# EAGLE board Link232-wifi (EAGLE 9.6.2)
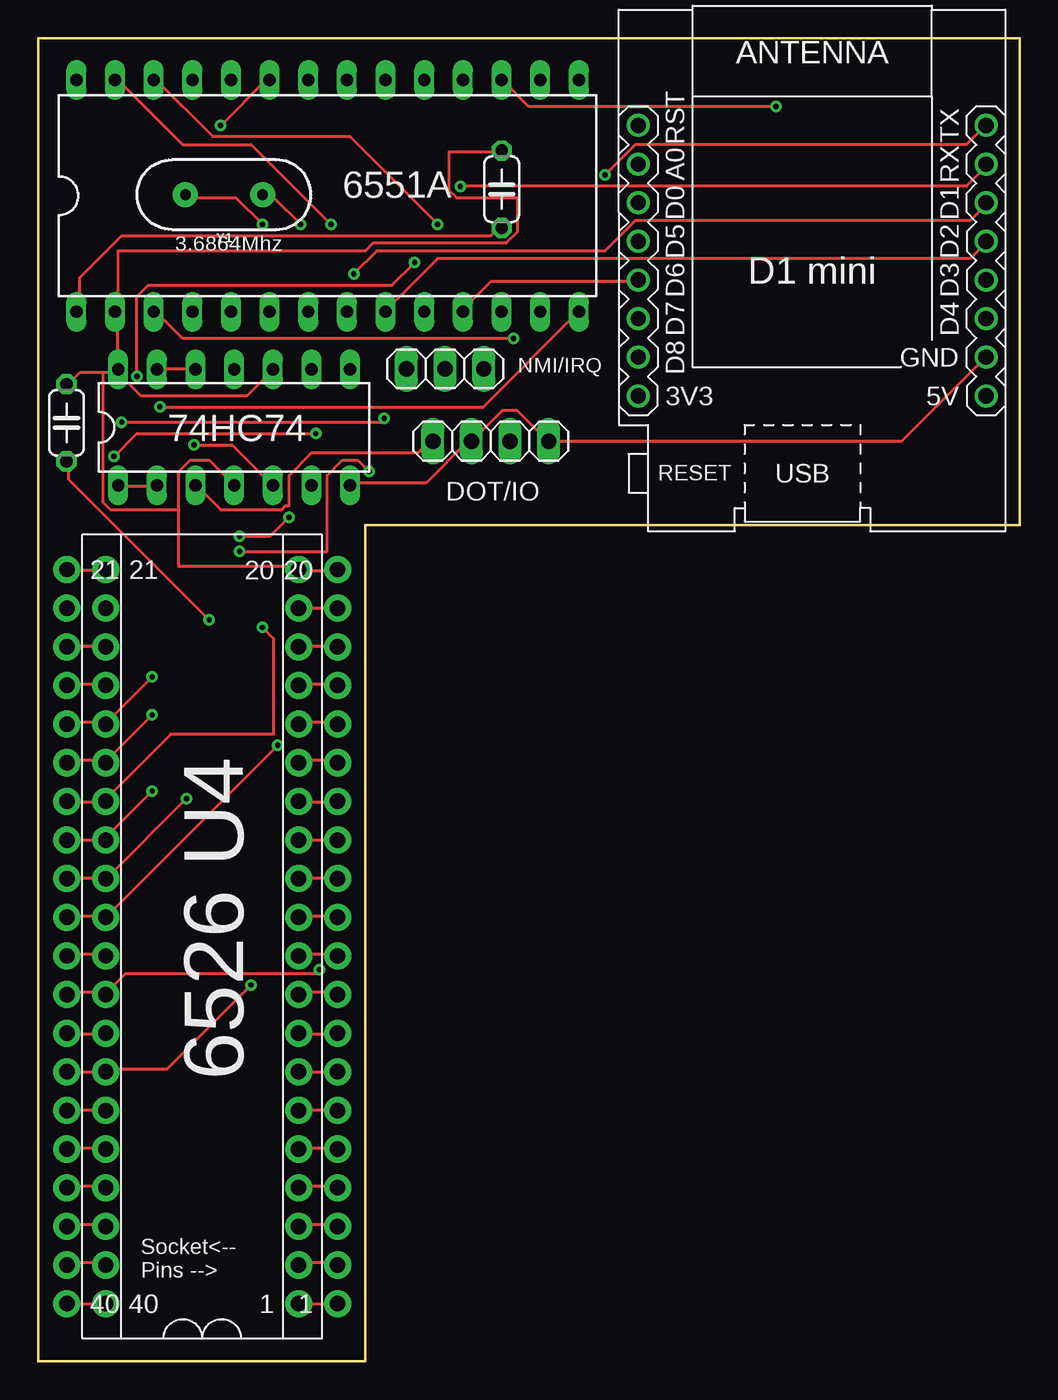
[diagram p0: board, top side]
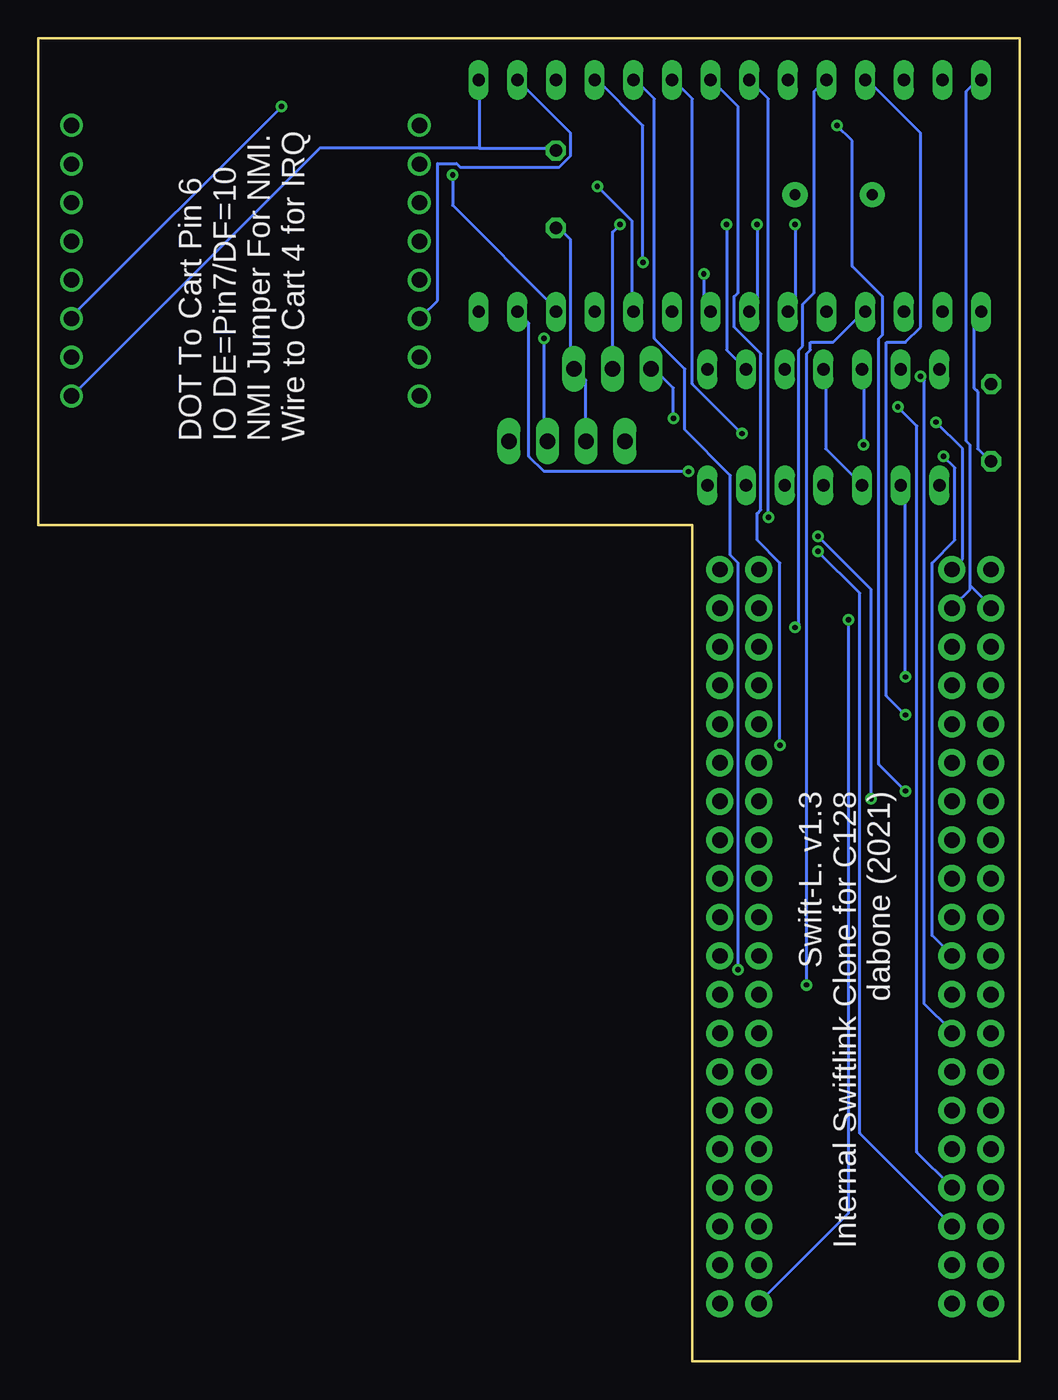
[diagram p1: board, bottom side, seen from below]

Size 64.5 x 87 mm. Coordinates in mm from the lower left corner, seen from the top.
Outline: 0,0 21.5,0 21.5,55 64.5,55 64.5,87 0,87 0,0
Copper layers (1*16): Top 0.035mm / dielectric 1.5mm / Bottom 0.035mm
Design rules "default *": minimum track width 8mil, minimum drill 0.35mm, track to track 6mil, track to pad 6mil, pad to pad 6mil, via to via 6mil, smd to smd 6mil, copper to edge 40mil, drill to drill 6mil, minimum pad ring 10mil, minimum via ring 8mil, stop-mask expansion 4mil, vias tented up to drill 0mil, thermal gap 10mil

## Footprints (pad centres in the part's own frame; a part is rotated, then mirrored left to right if it is on the bottom)
C050-024X044 = drill 0.813 octagon: 1 -2.54,0; 2 2.54,0
1X04 = drill 1.016 long: 1 -3.81,0; 2 -1.27,0; 3 1.27,0; 4 3.81,0
6551 = drill 0.813 long: 1 -16.51,-7.62; 2 -13.97,-7.62; 3 -11.43,-7.62; 4 -8.89,-7.62; 5 -6.35,-7.62; 6 -3.81,-7.62; 7 -1.27,-7.62; 8 1.27,-7.62; 9 3.81,-7.62; 10 6.35,-7.62; 11 8.89,-7.62; 12 11.43,-7.62; 13 13.97,-7.62; 14 16.51,-7.62; 15 16.51,7.62; 16 13.97,7.62; 17 11.43,7.62; 18 8.89,7.62; 19 6.35,7.62; 20 3.81,7.62; 21 1.27,7.62; 22 -1.27,7.62; 23 -3.81,7.62; 24 -6.35,7.62; 25 -8.89,7.62; 26 -11.43,7.62; 27 -13.97,7.62; 28 -16.51,7.62
DIL14 = drill 0.813 long: 1 -7.62,-3.81; 2 -5.08,-3.81; 3 -2.54,-3.81; 4 0,-3.81; 5 2.54,-3.81; 6 5.08,-3.81; 7 7.62,-3.81; 8 7.62,3.81; 9 5.08,3.81; 10 2.54,3.81; 11 0,3.81; 12 -2.54,3.81; 13 -5.08,3.81; 14 -7.62,3.81
DIP40 = drill 1.016 pad 1.778: 1 -24.13,-7.62; 2 -21.59,-7.62; 3 -19.05,-7.62; 4 -16.51,-7.62; 5 -13.97,-7.62; 6 -11.43,-7.62; 7 -8.89,-7.62; 8 -6.35,-7.62; 9 -3.81,-7.62; 10 -1.27,-7.62; 11 1.27,-7.62; 12 3.81,-7.62; 13 6.35,-7.62; 14 8.89,-7.62; 15 11.43,-7.62; 16 13.97,-7.62; 17 16.51,-7.62; 18 19.05,-7.62; 19 21.59,-7.62; 20 24.13,-7.62; 21 24.13,7.62; 22 21.59,7.62; 23 19.05,7.62; 24 16.51,7.62; 25 13.97,7.62; 26 11.43,7.62; 27 8.89,7.62; 28 6.35,7.62; 29 3.81,7.62; 30 1.27,7.62; 31 -1.27,7.62; 32 -3.81,7.62; 33 -6.35,7.62; 34 -8.89,7.62; 35 -11.43,7.62; 36 -13.97,7.62; 37 -16.51,7.62; 38 -19.05,7.62; 39 -21.59,7.62; 40 -24.13,7.62
1X03 = drill 1.016 long: 1 -2.54,0; 2 0,0; 3 2.54,0
WEMOS-D1-MINI = drill 1: JP1.1 -11.43,9.525; JP1.2 -11.43,6.985; JP1.3 -11.43,4.445; JP1.4 -11.43,1.905; JP1.5 -11.43,-0.635; JP1.6 -11.43,-3.175; JP1.7 -11.43,-5.715; JP1.8 -11.43,-8.255; JP2.1 11.43,9.525; JP2.2 11.43,6.985; JP2.3 11.43,4.445; JP2.4 11.43,1.905; JP2.5 11.43,-0.635; JP2.6 11.43,-3.175; JP2.7 11.43,-5.715; JP2.8 11.43,-8.255
HC49US = drill 0.7 pad 1.651: 1 -2.54,0; 2 2.54,0

## Placement (x,y rotation side)
C1  .1uf  [C050-024X044]  30.47,77.06 270 top
C2  .1uf  [C050-024X044]  1.87,61.71 270 top
DOT/IO  [1X04]  29.75,60.5 0 top
IC1  6551  [6551]  19.03,76.63 0 top
IC2  74LS74N  [DIL14]  12.89,61.41 0 top
IC3  6526  [DIP40]  9.51,27.93 90 top
IC4  6526  [DIP40]  12.07,27.93 90 top
JP1  NMI/IRQ  [1X03]  26.75,65.25 0 top
NODEMCUMINI  WEMOS-D1-MINI  [WEMOS-D1-MINI]  50.87,71.73 0 top
Y1  3.6864Mhz  [HC49US]  12.22,76.7 180 top

## Library data of the parts
C1 C2 = rcl; SPICEPREFIX: C
DOT/IO JP1 = pinhead
IC1 = 65xx
IC2 = 74xx-us
IC3 IC4 = 0RB_65xx
NODEMCUMINI = diy-modules
Y1 = SparkFun-Clocks

## Nets
3V3: NODEMCUMINI.JP1.8
+5V: C1.1 C2.1 IC1.2 IC1.15 IC2.4 IC2.10 IC2.14 IC3.20 IC4.20 NODEMCUMINI.JP2.8
/CS: IC3.23 IC4.23
/FLAG: IC3.24 IC4.24
/PC: IC3.18 IC4.18
CNT: IC3.40 IC4.40
D0: IC1.18 IC3.33 IC4.33
D1: IC1.19 IC3.32 IC4.32
D2: IC1.20 IC3.31 IC4.31
D3: IC1.21 IC3.30 IC4.30
D4: IC1.22 IC3.29 IC4.29
D5: IC1.23 IC3.28 IC4.28
D6: IC1.24 IC3.27 IC4.27
D7: IC1.25 IC3.26 IC4.26
GND: C1.2 C2.2 DOT/IO.2 DOT/IO.4 IC1.1 IC2.7 IC3.1 IC4.1 JP1.3 NODEMCUMINI.JP2.7
IRQ: IC3.21 IC4.21 JP1.1
N$1: DOT/IO.1 IC2.3 IC2.11
N$2: IC2.5 IC2.12 IC2.13
N$3: IC1.27 IC2.9
N$4: IC1.26 JP1.2
N$5: DOT/IO.3 IC1.3
N$9: IC1.6 Y1.2
N$10: IC1.7 Y1.1
N$11: IC1.12 NODEMCUMINI.JP2.1
N$12: IC1.10 NODEMCUMINI.JP2.2
N$13: IC1.8 NODEMCUMINI.JP2.3
N$14: IC1.9 NODEMCUMINI.JP2.4
N$15: IC1.17 NODEMCUMINI.JP2.6
N$16: IC1.11 NODEMCUMINI.JP1.5
N$17: IC1.16 NODEMCUMINI.JP1.6
PA0: IC3.2 IC4.2
PA1: IC3.3 IC4.3
PA2: IC3.4 IC4.4
PA3: IC3.5 IC4.5
PA4: IC3.6 IC4.6
PA5: IC3.7 IC4.7
PA6: IC3.8 IC4.8
PA7: IC3.9 IC4.9
PB0: IC3.10 IC4.10
PB1: IC3.11 IC4.11
PB2: IC3.12 IC4.12
PB3: IC3.13 IC4.13
PB4: IC3.14 IC4.14
PB5: IC3.15 IC4.15
PB6: IC3.16 IC4.16
PB7: IC3.17 IC4.17
PHI2: IC2.1 IC2.2 IC3.25 IC4.25
RES: IC1.4 IC3.34 IC4.34
RS0: IC1.13 IC3.38 IC4.38
RS1: IC1.14 IC3.37 IC4.37
RS2: IC3.36 IC4.36
RS3: IC3.35 IC4.35
RW: IC1.28 IC3.22 IC4.22
SP: IC3.39 IC4.39
TOD: IC3.19 IC4.19

## Tracks (layer width: path | path; a pad name or v marks a point on that pad's centre or on a via)
+5V
  Top 0.203: 9.25,56 9.25,52.25 17,52.25 IC3.20 17.25,52 19.5,52 IC4.20 | 9.25,56 9.25,58.5 10,59.25 11.25,59.25 12.75,57.75 IC2.4 | 5.25,65 4.25,65 | 4.25,65 2.75,65 2,64.25 C2.1 | 5.25,65 6.75,63.5 13.75,63.5 15.25,65 IC2.10 | 5.25,65 IC2.14 5.25,65.25 5.25,69 IC1.2 5.25,69.25 5.25,73 21.5,73 22,73.5 30.75,73.5 31.5,74.25 31.5,76.5 27.5,76.5 27,77 27,79.5 30.25,79.5 C1.1 | 9.25,56 4.75,56 4.25,56.5 4.25,65
  Bottom 0.203: 35.5,79.75 30.5,79.75 C1.1 | 35.5,79.75 35.5,84.25 IC1.15 | 35.5,79.75 46,79.75 62.25,63.5 NODEMCUMINI.JP2.8
/CS
  Top 0.203: IC3.23 2,47 4.25,47 IC4.23
/FLAG
  Top 0.203: IC3.24 2,44.5 4.25,44.5 IC4.24
/PC
  Top 0.203: IC3.18 17.25,47 19.5,47 IC4.18
CNT
  Top 0.203: IC3.40 2,3.75 4.25,3.75 IC4.40
D0  (via drill 0.35)
  Top 0.203: v24.75,72.25 23.25,70.75 7.25,70.75 6.5,70 v6.5,64.75 | IC3.33 2,21.5 4.25,21.5 IC4.33
  Bottom 0.203: v24.75,72.25 24.75,81.25 27.75,84.25 IC1.18 | v6.5,64.75 6.25,64.5 6.25,23.5 4.5,21.75 IC4.33
D1  (via drill 0.35)
  Top 0.203: v18.5,25.75 18.25,25.5 5.75,25.5 4.5,24.25 IC4.32 4.25,24.25 2,24.25 IC3.32
  Bottom 0.203: v18.5,25.75 18.5,52.5 19,53 19,58.25 22,61.25 22,65.25 24,67.25 24,83 25.25,84.25 IC1.19
D2  (via drill 0.35)
  Top 0.203: v18.25,61 6.5,61 v5,59.5 | IC3.31 2,26.75 4.25,26.75 IC4.31
  Bottom 0.203: v18.25,61 21.5,64.25 21.5,83 22.75,84.25 IC1.20 | v5,59.5 4.25,58.75 4.25,54 5.75,52.5 5.75,28 4.5,26.75 IC4.31
D3  (via drill 0.35)
  Top 0.203: v15.75,40.5 IC4.30 4.25,29.25 2,29.25 IC3.30
  Bottom 0.203: v15.75,40.5 15.75,52.5 17.25,54 17.25,55.75 17,56 17,66.25 18.75,68 18.75,70 18.5,70.25 18.5,82.5 20.25,84.25 IC1.21
D4  (via drill 0.35)
  Top 0.203: v16.5,55.5 15.25,54.25 v13.25,54.25 | v9.75,37 4.5,31.75 IC4.29 4.25,31.75 2,31.75 IC3.29
  Bottom 0.203: v16.5,55.5 16.5,83 IC1.22 | v13.25,54.25 9.75,50.75 v9.75,37
D5  (via drill 0.35)
  Top 0.203: v12,81.25 15,84.25 IC1.23 | v7.5,37.5 4.5,34.5 IC4.28 4.25,34.25 2,34.25 IC3.28
  Bottom 0.203: v12,81.25 11,80.25 11,72 9,70 9,67.5 9.25,67.25 9.25,39.25 v7.5,37.5
D6  (via drill 0.35)
  Top 0.203: v14.75,48.25 15.5,47.5 15.5,41.25 8.75,41.25 4.5,37 IC4.27 4.25,36.75 2,36.75 IC3.27
  Bottom 0.203: v14.75,48.25 14.5,48.5 14.5,66.5 14.25,66.75 14.25,69.5 13.5,70.25 13.5,83.5 12.75,84.25 IC1.24
D7  (via drill 0.35)
  Top 0.203: v7.5,42.5 4.5,39.5 IC4.26 4.25,39.5 2,39.5 IC3.26
  Bottom 0.203: v7.5,42.5 8.75,43.75 8.75,67 7.5,67 6.5,68 6.5,80.75 10,84.25 IC1.25
GND  (via drill 0.35)
  Top 0.203: IC2.7 20.75,57.75 25.5,57.75 28.25,60.5 DOT/IO.2 28.5,60.5 30.5,62.5 31.5,62.5 33.5,60.5 DOT/IO.4 56.75,60.5 62.25,66 NODEMCUMINI.JP2.7 | IC3.1 17.25,3.75 19.5,3.75 IC4.1 | v11.25,48.75 2,58 2,59 C2.2 | C1.2 30.25,74.5 29.75,74 5.5,74 2.75,71.25 2.75,69.25 IC1.1
  Bottom 0.203: C1.2 30.25,74.5 29.5,73.75 29.5,65.25 JP1.3 29.25,65.25 28.5,64.5 28.5,60.5 DOT/IO.2 | C2.2 2,59.25 2.75,60 2.75,63.75 3,64 3,68.75 2.75,69 IC1.1 | v11.25,48.75 11.25,9.75 17,4 IC3.1
IRQ  (via drill 0.35)
  Top 0.203: v22.75,62 22.5,61.75 v5.5,61.75 | IC3.21 2,52 4.25,52 IC4.21
  Bottom 0.203: v22.75,62 22.75,64 24,65.25 JP1.1 | v5.5,61.75 3.75,60 3.75,52.75 4.25,52.25 IC4.21
N$1
  Top 0.203: DOT/IO.1 25.75,60.5 25,59.75 18,59.75 16.5,58.25 16.5,56.25 16.25,56.25 16,56 12,56 10.5,57.5 IC2.3
  Bottom 0.203: IC2.3 12.75,60 12.75,65 IC2.11
N$2  (via drill 0.35)
  Top 0.203: IC2.13 8,65.25 10.25,65.25 IC2.12 | v10.25,60.25 12.75,60.25 15.25,57.75 IC2.5
  Bottom 0.203: v10.25,60.25 10.25,65 IC2.12
N$3  (via drill 0.35)
  Top 0.203: v19.25,74.75 14,80 9.5,80 5.25,84.25 IC1.27
  Bottom 0.203: IC2.9 19.25,66.5 v19.25,74.75
N$4  (via drill 0.35)
  Top 0.203: v26.25,74.75 20.5,80.5 11.5,80.5 7.75,84.25 IC1.26
  Bottom 0.203: v26.25,74.75 26.75,74.25 JP1.2
N$5  (via drill 0.35)
  Top 0.203: v31.25,67.25 9.5,67.25 7.75,69 IC1.3
  Bottom 0.203: v31.25,67.25 31.25,60.5 DOT/IO.3
N$9  (via drill 0.35)
  Top 0.203: v14.75,74.75 13,76.5 9.75,76.5 Y1.2
  Bottom 0.203: v14.75,74.75 14.75,69.5 15,69.25 IC1.6
N$10  (via drill 0.35)
  Top 0.203: v17.25,74.75 15.5,76.5 15,76.5 Y1.1
  Bottom 0.203: v17.25,74.75 17.25,69.75 17.75,69.25 IC1.7
N$11  (via drill 0.35)
  Top 0.203: v37.25,78 39.25,80 61,80 62.25,81.25 NODEMCUMINI.JP2.1
  Bottom 0.203: v37.25,78 37.25,76 30.5,69.25 IC1.12
N$12  (via drill 0.35)
  Top 0.203: v27.75,77.25 61,77.25 62.25,78.5 NODEMCUMINI.JP2.2
  Bottom 0.203: v27.75,77.25 25.5,75 25.5,69.25 IC1.10
N$13  (via drill 0.35)
  Top 0.203: v20.75,71.5 22.25,73 37.25,73 39.25,75 61.25,75 62.25,76 NODEMCUMINI.JP2.3
  Bottom 0.203: v20.75,71.5 20.75,69.5 20.5,69.25 IC1.8
N$14
  Top 0.203: IC1.9 23,69.25 26.25,72.5 61.25,72.5 62.25,73.5 NODEMCUMINI.JP2.4
N$15  (via drill 0.35)
  Top 0.203: v48.5,82.5 32.25,82.5 30.5,84.25 IC1.17
  Bottom 0.203: v48.5,82.5 62.25,68.75 NODEMCUMINI.JP2.6
N$16
  Top 0.203: IC1.11 28,69.25 29.75,71 39.25,71 NODEMCUMINI.JP1.5
N$17
  Bottom 0.203: IC1.16 29.5,80.75 29.5,79.25 30.25,78.5 36.75,78.5 37,78.75 38.25,78.75 38.25,69.75 39.25,68.75 NODEMCUMINI.JP1.6
PA0
  Top 0.203: IC3.2 17.25,6.5 19.5,6.5 IC4.2
PA1
  Top 0.203: IC3.3 17.25,9 19.5,9 IC4.3
PA2
  Top 0.203: IC3.4 17.25,11.5 19.5,11.5 IC4.4
PA3
  Top 0.203: IC3.5 17.25,14 19.5,14 IC4.5
PA4
  Top 0.203: IC4.6 IC3.6
PA5
  Top 0.203: IC3.7 17.25,19 19.5,19 IC4.7
PA6
  Top 0.203: IC3.8 17.25,21.5 19.5,21.5 IC4.8
PA7
  Top 0.203: IC3.9 17.25,24.25 19.5,24.25 IC4.9
PB0
  Top 0.203: IC3.10 17.25,26.75 19.5,26.75 IC4.10
PB1
  Top 0.203: IC3.11 17.25,29.25 19.5,29.25 IC4.11
PB2
  Top 0.203: IC3.12 17.25,31.75 19.5,31.75 IC4.12
PB3
  Top 0.203: IC3.13 17.25,34.25 19.5,34.25 IC4.13
PB4
  Top 0.203: IC3.14 17.25,36.75 19.5,36.75 IC4.14
PB5
  Top 0.203: IC3.15 17.25,39.5 19.5,39.5 IC4.15
PB6
  Top 0.203: IC3.16 17.25,42 19.5,42 IC4.16
PB7
  Top 0.203: IC3.17 17.25,44.5 19.5,44.5 IC4.17
PHI2  (via drill 0.35)
  Top 0.203: IC2.1 5.5,57.5 7.75,57.5 IC2.2 | v7.5,45 4.5,42 IC4.25 4.25,42 2,42 IC3.25
  Bottom 0.203: v7.5,45 7.5,57.25 7.75,57.5 IC2.2
RES  (via drill 0.35)
  Top 0.203: v14,24.75 8.5,19.25 4.5,19.25 IC4.34 4.25,19 2,19 IC3.34
  Bottom 0.203: v14,24.75 14,66.25 13.75,66.5 13.75,67 12.25,67 10.25,69 IC1.4
RS0  (via drill 0.35)
  Top 0.203: v21.75,58.5 21,59.25 20,59.25 19,58.25 19,53.25 v13.25,53.25 | IC3.38 2,9 4.25,9 IC4.38
  Bottom 0.203: v21.75,58.5 31.25,58.5 32.25,59.5 32.25,68.25 IC1.13 | v13.25,53.25 10.5,50.5 10.5,15 4.5,9 IC4.38
RS1  (via drill 0.35)
  Top 0.203: v8,62.75 29.25,62.75 35.5,69 IC1.14 | IC3.37 2,11.5 4.25,11.5 IC4.37
  Bottom 0.203: v8,62.75 6.75,61.5 6.75,13.75 4.5,11.5 IC4.37
RS2
  Top 0.203: IC3.36 2,14 4.25,14 IC4.36
RS3
  Top 0.203: IC4.35 IC3.35
RW
  Bottom 0.203: 3.25,51 3.25,50.75 4.25,49.75 IC4.22 | 3.25,51 3.25,60.25 3.5,60.5 3.5,83.5 2.75,84.25 IC1.28 | 3.25,51 2,49.75 IC3.22
SP
  Top 0.203: IC3.39 2,6.5 4.25,6.5 IC4.39
TOD
  Top 0.203: IC3.19 17.25,49.5 19.5,49.5 IC4.19

## Text on the board
tPlace: 6551A | 3.6864Mhz | NMI/IRQ | 74HC74 | 6526 U4 | Socket<-- / Pins -->
bPlace: DOT To Cart Pin 6 / IO DE=Pin7/DF=10 / NMI Jumper For NMI. / Wire to Cart 4 for IRQ | Swift-L. v1.3 / Internal Swiftlink Clone for C128 / dabone (2021)